# Altium PCB BodyTubeRev.PcbDoc
Units mil, origin at the board's own origin, x right, y up, seen from the top; angles counter-clockwise.
Board outline 3300 x 3900 mil, 2 copper layers (Top Layer, Bottom Layer); 21 components, 32 nets, 220 pads, 12 vias.
Unrouted connection lines stored in the file: 6.
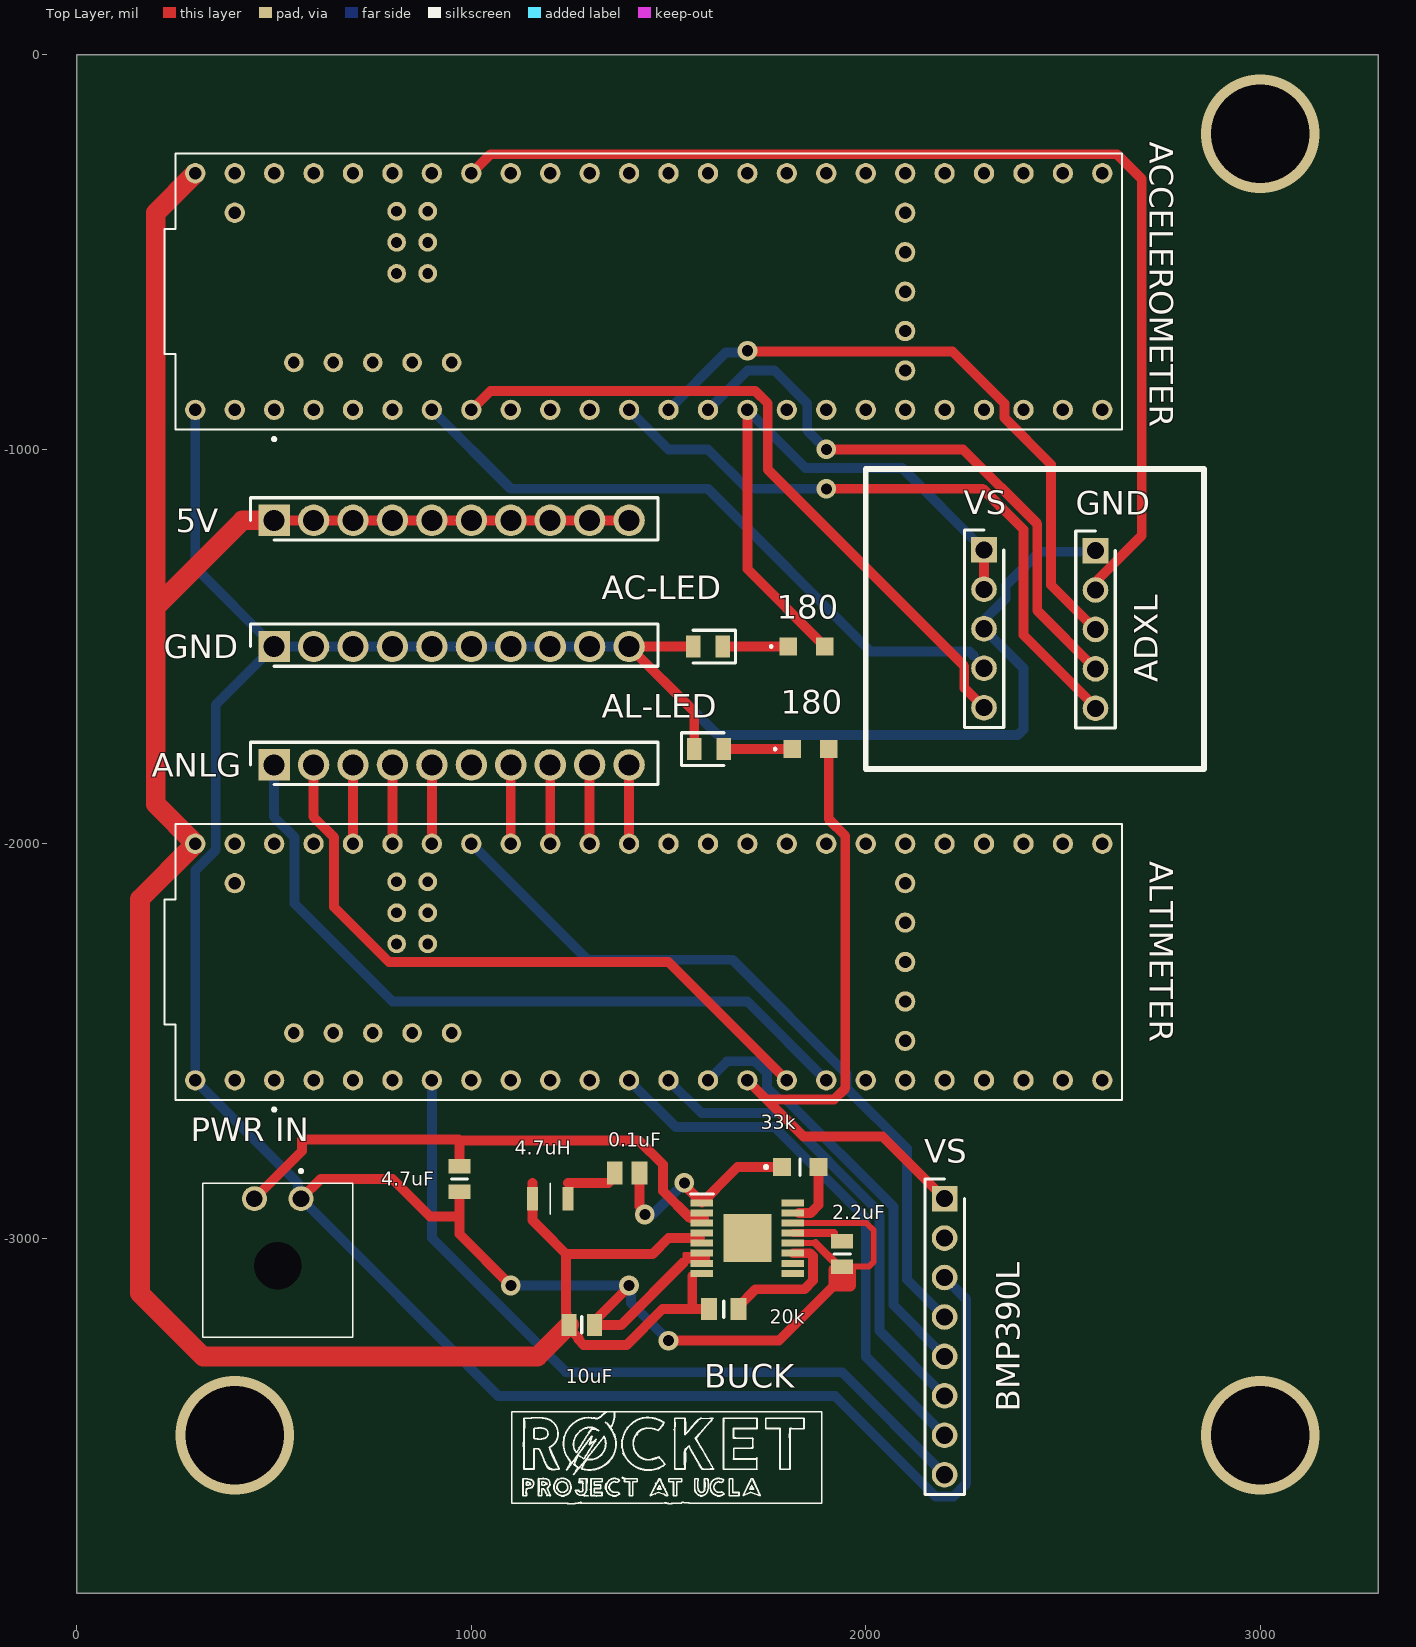
[diagram p0: Top Layer view]
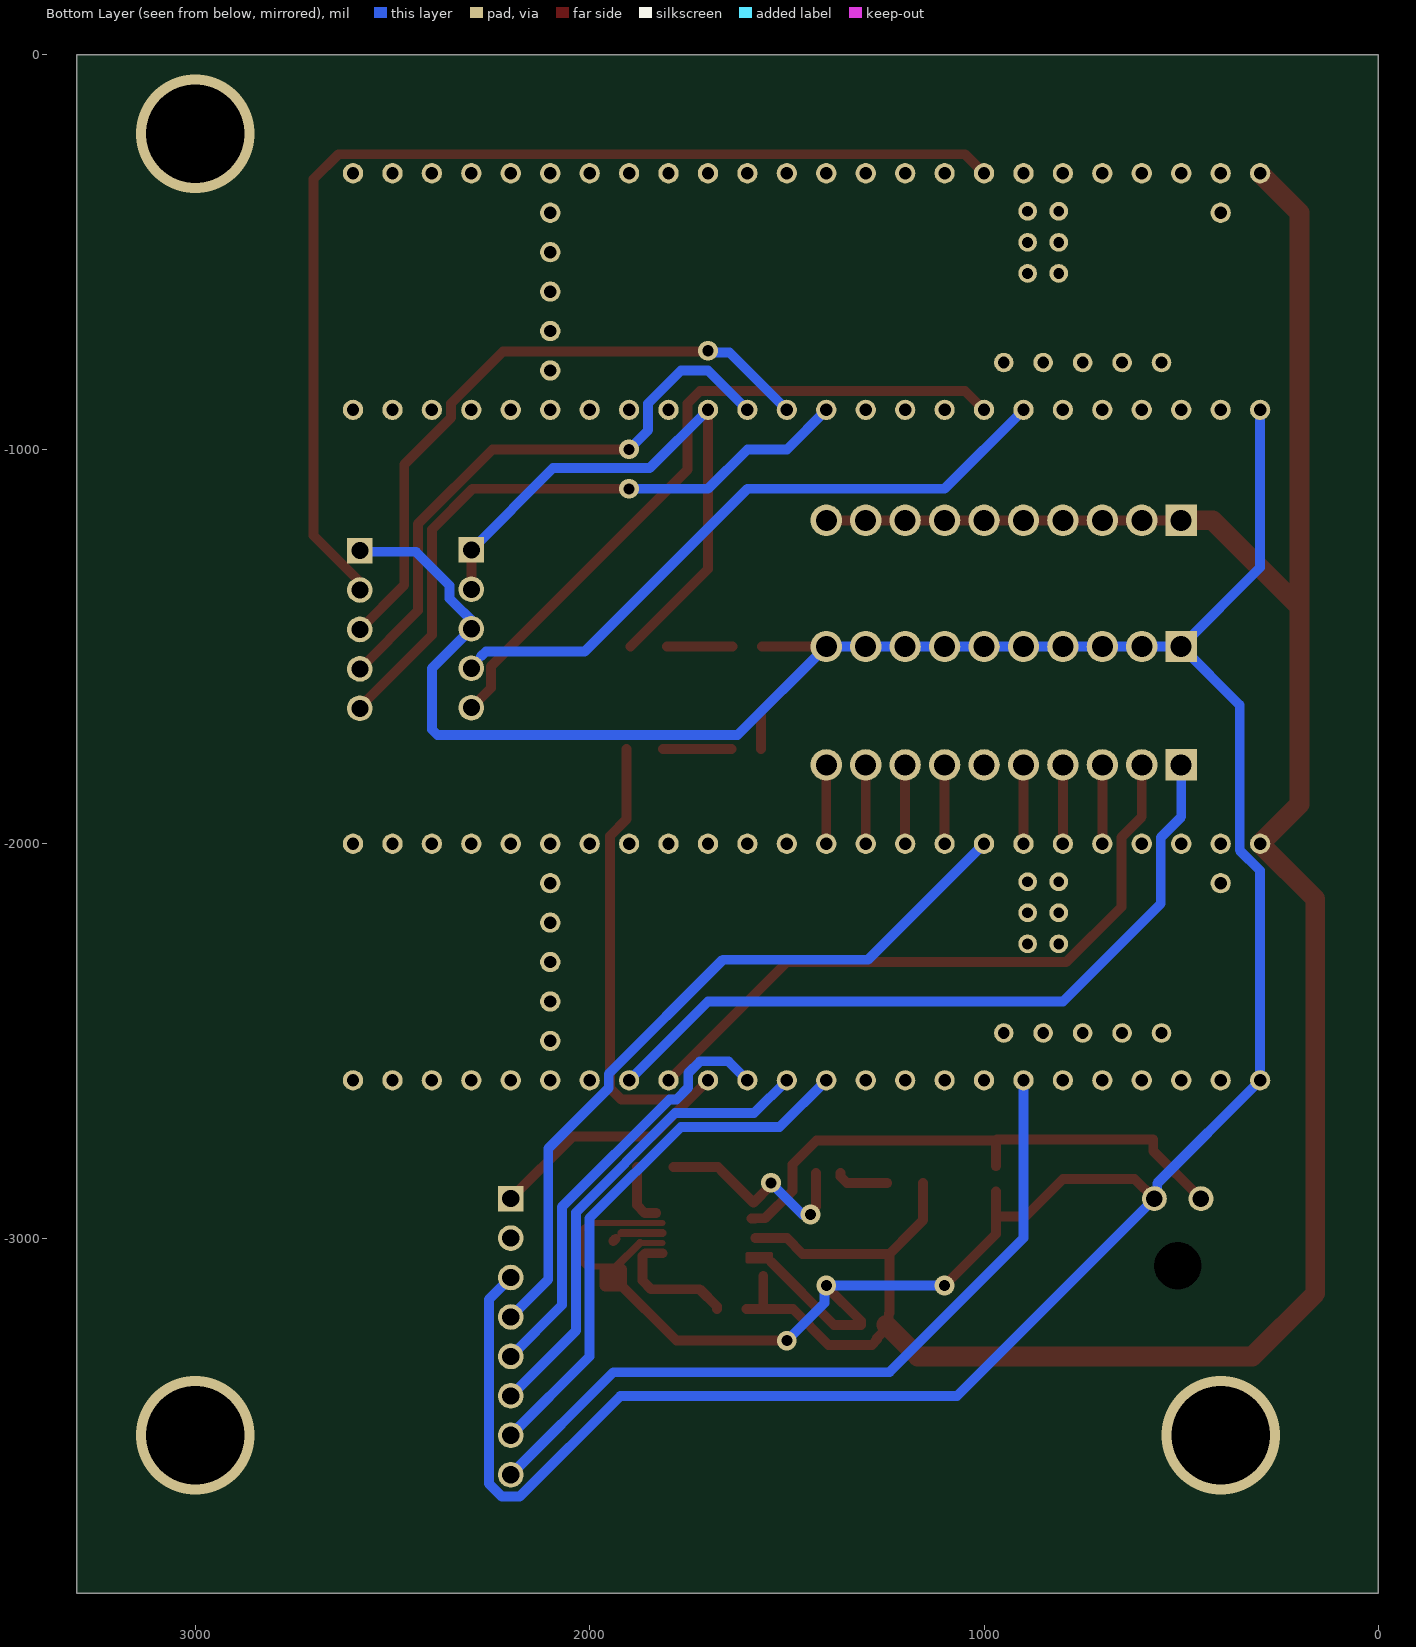
[diagram p1: Bottom Layer view, seen from below]
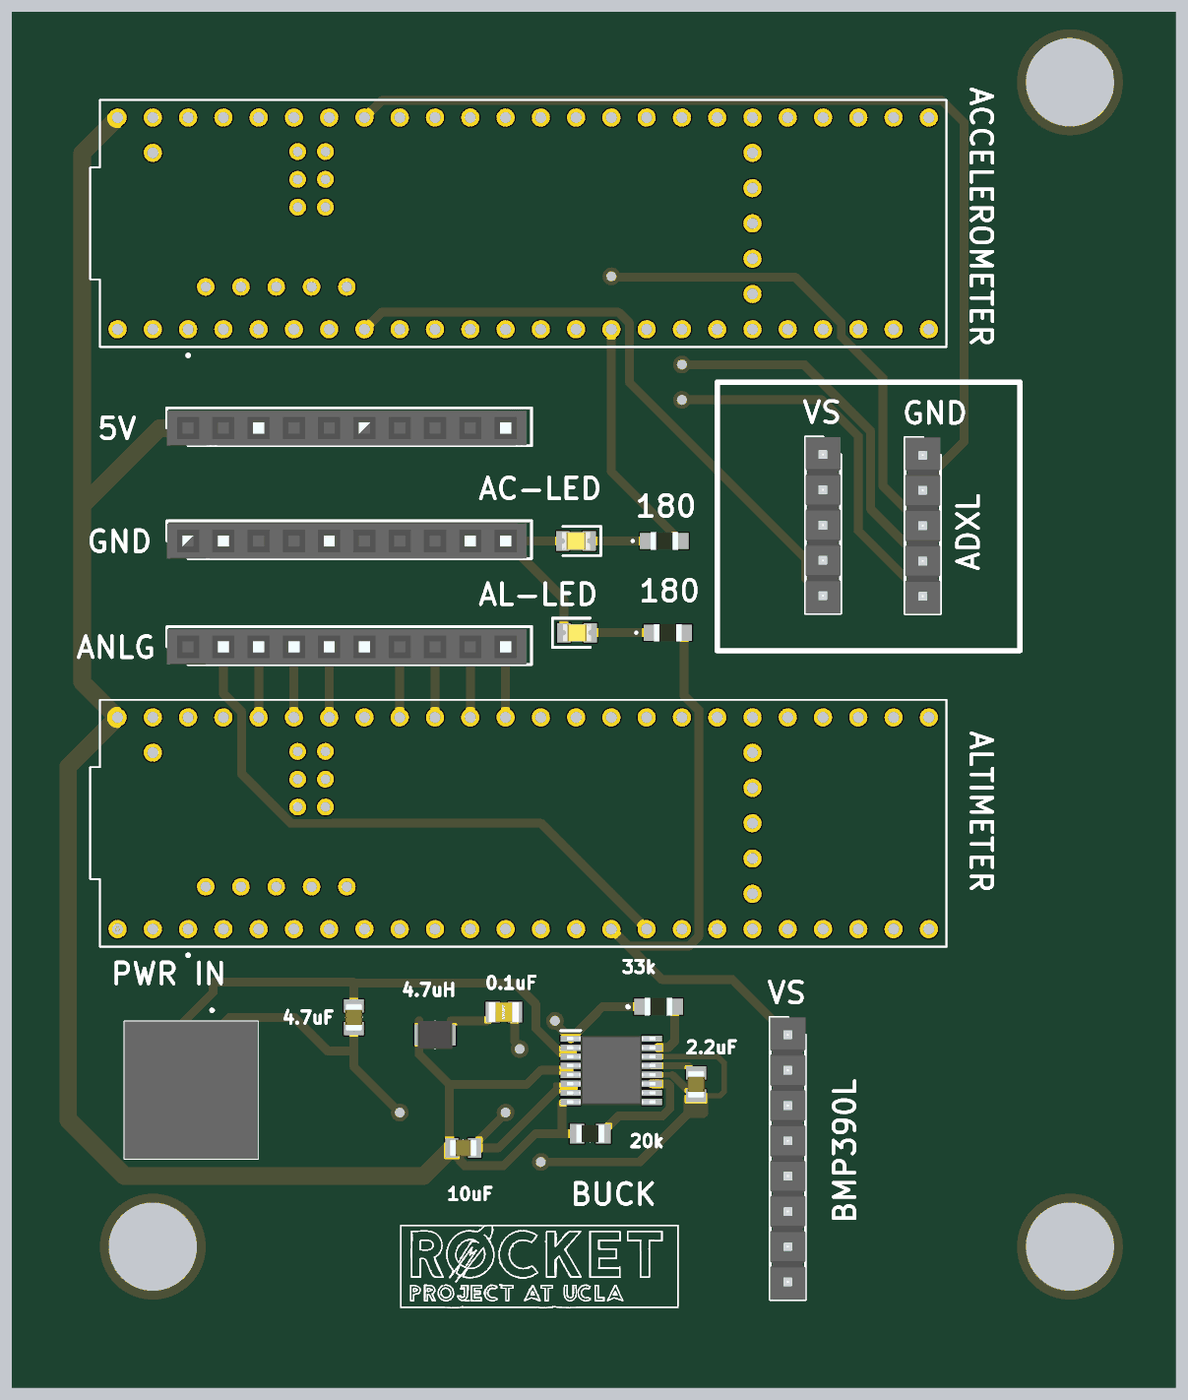
[diagram p2: 3D render of the assembled board from above, using the file's embedded part models]

## Layer stack, top to bottom
Top Solder: solder mask 0.4, Solder Resist, Dk 3.5
Top Layer: signal copper 1.4
Dielectric 1: dielectric 12.6, FR-4, Dk 4.8
Bottom Layer: signal copper 1.4
Bottom Solder: solder mask 0.4, Solder Resist, Dk 3.5

## Board outline
0,-3900 3300,-3900 3300,0 0,0

## Design rules (kind name [scope] priority, off if disabled: settings)
Clearance [All] p1: gap=10 ignorepadtopadclearanceinfootprint=FALSE except(0: Arc-Hole Track-Hole SMDPad-Hole THPad-Hole Via-Hole Fill-Hole Poly-Hole Region-Hole Text-Hole)
PolygonConnect [All] p1: connectstyle=Relief reliefconductorwidth=10 reliefentries=4 polygonreliefangle="90 Angle" airgapwidth=10
RoutingVias [All] p1: holewidth=50 width=100 viastyle="Through Hole" minholewidth=28 minwidth=50 maxholewidth=50 maxwidth=100
SolderMaskExpansion [All] p1: expansion=4 istentingtop=FALSE
Width [All] p1: maxlimit=25 minlimit=10 preferedwidth=10
30 further rules are at their usual default settings.

## Classes and differential pairs
component class BodyTubeRev: 0.1uF 2.2uF 4.7uF 4.7uH 5V 10uF 20k 33k 180 AC-LED ACCELEROMETER AL-LED ALTIMETER ANLG BUCK GND "PWR IN" VS

## Components (designator, comment, footprint, x,y, rotation, side; value= is the part's Value field where it differs from the comment)
0.1uF "0.1 uF" CAPC2012X88N 1395,-2835 r0 top (schematic designator C1)
2.2uF "2.2 uF" CAPC2012X140N 1940,-3040 r90 top (schematic designator C3)
4.7uF "4.7 uF" CAPC2012X140N 970,-2850 r90 top (schematic designator C2)
4.7uH "4.7 uH" LQM2HPN1R0MG0L 1200,-2900 r180 top (schematic designator L1)
5V "5V" RHDR10W80P0X254_1X10_2590X254X850P 500,-1180 r0 top (schematic designator J5)
10uF "10 uF" CAPC2012X140N 1280,-3220 r0 top (schematic designator C4)
20k "20k" RESC2012X70N 1640,-3180 r0 top (schematic designator R4)
33k "33K" ERJ6ENF1000V 1833.74,-2820 r0 top (schematic designator R3)
180 "180" ERJ6EN_(0805) 1850,-1500 r0 top (schematic designator R2)
180 "180" ERJ6EN_(0805) 1860,-1760 r0 top (schematic designator R1)
AC-LED "" LEDC2012X80N 1600,-1500 r180 top (schematic designator LED2)
ACCELEROMETER "ACCELEROMETER" MODULE_DEV-16771 1450,-600 r0 top (schematic designator U2)
AL-LED "" LEDC2012X80N 1602.6,-1760 r0 top (schematic designator LED1)
ALTIMETER "ALTIMETER" MODULE_DEV-16771 1450,-2300 r0 top (schematic designator U1)
ANLG "ANALOG" RHDR10W80P0X254_1X10_2590X254X850P 500,-1800 r0 top (schematic designator J4)
BUCK "BUCK" SOP65P638X110-17N 1700,-3000 r0 top (schematic designator IC1)
GND "GND" RHDR10W80P0X254_1X10_2590X254X850P 500,-1500 r0 top (schematic designator J7)
GND "GND Pin 1 Side" HDRV5W64P0X254_1X5_1270X254X813P 2582.68,-1256.69 r90 top (schematic designator J3)
"PWR IN" "POWER IN" 0436500201 568.11,-2900 r0 top (schematic designator J6)
VS "VS Pin 1 Side" HDRV5W64P0X254_1X5_1270X254X813P 2300,-1255 r90 top (schematic designator J2)
VS "BMP390L VS Pin 1" HDRV8W64P0X254_1X8_2032X254X813P 2200,-2900 r90 top (schematic designator J1)

## Footprints (in the part's own frame and the unit in brackets; to place one, negate y for a bottom-side part, rotate by r counter-clockwise, add the part's x,y. Pads: shape width x height; smd on the part's side, far side on the other; paste and mask are expansions set on the pad)
0436500201 [mm]
  round 1.605 hole 1.07: 1(0,0) 2(-3,0)
  round 1.525 hole 3.05 unplated: MH1(-1.5,-4.32)
  silkscreen extent -6.32,-8.92 3.32,1.88, body extent -6.32,-8.92 3.32,0.98, height 5.92
CAPC2012X88N [mm]
  rect 1.02x1.47 smd: 1(-0.8,0) 2(0.8,0)
  body extent -1.1,-0.73 1.1,0.72, height 0.88
CAPC2012X140N [mm]
  rect 0.94x1.43 smd: 1(-0.82,0) 2(0.82,0)
  silkscreen extent 0,-0.53 0,0.53, body extent -1,-0.63 1,0.63, height 1.4
ERJ6EN_(0805) [mm]
  rect 1.15x1.15 smd: 1(-1.175,0) 2(1.175,0)
  silkscreen extent -2.32,-0.05 -2.22,0.05, body extent -1,-0.63 1,0.63, height 0.6
ERJ6ENF1000V [mm]
  rect 1.15x1.15 smd: 1(-1.175,0) 2(1.175,0)
  silkscreen extent -2.3,-0.53 0,0.53, body extent -1,-0.63 1,0.63, height 0.6
HDRV5W64P0X254_1X5_1270X254X813P [mm]
  rect 1.65x1.65 hole 1.1: 1(0,0)
  round 1.65 hole 1.1: 2(-2.54,0) 3(-5.08,0) 4(-7.62,0) 5(-10.16,0)
  silkscreen extent -11.43,-1.27 1.27,1.27, body extent -11.43,-1.27 1.27,1.27, height 8.13
HDRV8W64P0X254_1X8_2032X254X813P [mm]
  rect 1.65x1.65 hole 1.1: 1(0,0)
  round 1.65 hole 1.1: 2(-2.54,0) 3(-5.08,0) 4(-7.62,0) 5(-10.16,0) 6(-12.7,0) 7(-15.24,0) 8(-17.78,0)
  silkscreen extent -19.05,-1.27 1.27,1.27, body extent -19.05,-1.27 1.27,1.27, height 8.13
LEDC2012X80N [mm]
  rect 0.95x1.4 smd: 1(-0.95,0) 2(0.95,0)
  silkscreen extent -1.78,-1.05 0.95,1.05, body extent -1,-0.63 1,0.63, height 0.8
LQM2HPN1R0MG0L [mm]
  rect 0.7x1.5 smd: 1(-1.15,0) 2(1.15,0)
  silkscreen extent 0,-1 0,1, body extent -1.25,-1 1.25,1, height 0.91
MODULE_DEV-16771 [mm]
  round 1.308 hole 0.8: 0(-26.67,-7.62) 1(-24.13,-7.62) 2(-21.59,-7.62) 3(-19.05,-7.62) 3.3V_1(6.35,-7.62) 3.3V_2(-24.13,7.62) 3.3V_3(16.51,-2.54) 4(-16.51,-7.62) 5(-13.97,-7.62) 6(-11.43,-7.62) 7(-8.89,-7.62) 8(-6.35,-7.62) 9(-3.81,-7.62) 10(-1.27,-7.62) 11(1.27,-7.62) 12(3.81,-7.62) 13(3.81,7.62) 14(1.27,7.62) 15(-1.27,7.62) 16(-3.81,7.62) 17(-6.35,7.62) 18(-8.89,7.62) 19(-11.43,7.62) 20(-13.97,7.62) 21(-16.51,7.62) 22(-19.05,7.62) 23(-21.59,7.62) 24(8.89,-7.62) 25(11.43,-7.62) 26(13.97,-7.62) 27(16.51,-7.62) 28(19.05,-7.62) 29(21.59,-7.62) 30(24.13,-7.62) 31(26.67,-7.62) 32(29.21,-7.62) 33(29.21,7.62) 34(26.67,7.62) 35(24.13,7.62) 36(21.59,7.62) 37(19.05,7.62) 38(16.51,7.62) 39(13.97,7.62) 40(11.43,7.62) 41(8.89,7.62) GND1(-29.21,-7.62) GND2(6.35,7.62) GND3(-26.67,7.62) GND4(16.51,0) ON/OFF(16.51,5.08) PROGRAM(16.51,2.54) VBAT(16.51,-5.08) VIN(-29.21,7.62) VUSB(-26.67,5.08)
  round 1.258 hole 0.75: 5V(-22.86,-4.57) D+(-17.78,-4.57) D-(-20.32,-4.57) USB_GND1(-15.24,-4.57) USB_GND2(-12.7,-4.57)
  round 1.208 hole 0.7: GND5(-14.24,3.17) LED(-16.24,3.17) R+(-16.24,5.17) R-(-14.24,5.17) T+(-14.24,1.17) T-(-16.24,1.17)
  silkscreen extent -31.18,-9.6 30.48,8.89
RESC2012X70N [mm]
  rect 1.05x1.4 smd: 1(-0.95,0) 2(0.95,0)
  silkscreen extent 0,-0.53 0,0.53, body extent -1,-0.63 1,0.63, height 0.7
RHDR10W80P0X254_1X10_2590X254X850P [mm]
  rect 2.025x2.025 hole 1.35: 1(0,0)
  round 2.025 hole 1.35: 2(2.54,0) 3(5.08,0) 4(7.62,0) 5(10.16,0) 6(12.7,0) 7(15.24,0) 8(17.78,0) 9(20.32,0) 10(22.86,0)
  silkscreen extent -1.52,-1.27 24.73,1.46, body extent -1.52,-1.27 24.38,1.27, height 8.5
SOP65P638X110-17N [mm]
  rect 1.45x0.45 smd: 1(-2.925,2.275) 2(-2.925,1.625) 3(-2.925,0.975) 4(-2.925,0.325) 5(-2.925,-0.325) 6(-2.925,-0.975) 7(-2.925,-1.625) 8(-2.925,-2.275) 9(2.925,-2.275) 10(2.925,-1.625) 11(2.925,-0.975) 12(2.925,-0.325) 13(2.925,0.325) 14(2.925,0.975) 15(2.925,1.625) 16(2.925,2.275)
  rect 3.1x3.1 smd: 17(0,0)
  silkscreen extent -3.65,2.85 -2.2,2.85, body extent -3.19,-2.5 3.19,2.5, height 1.1

## Part data
0.1uF: library part C0805C222K5RAC7025, "Capacitor", Manufacturer_Name=KEMET, Mouser Part Number=80-C0805C222K5RACTM, Datasheet Link=https://componentsearchengine.com/Datasheets/1/C0805C222K5RAC7025.pdf, Height=0.88mm, Manufacturer_Part_Number=C0805C222K5RAC7025, Mouser Price/Stock=https://www.mouser.com/Search/Refine.aspx?Keyword=80-C0805C222K5RACTM
2.2uF 10uF: library part C0805C106K8PAC7800, "Capacitor", Manufacturer_Name=KEMET, Mouser Part Number=N/A, Arrow Part Number=C0805C106K8PAC7800, Arrow Price/Stock=https://www.arrow.com/en/products/c0805c106k8pac7800/kemet-corporation, Datasheet Link=https://www.kemet.com/specsheet/C0805C106K8PACTU, Height=1.4mm, Manufacturer_Part_Number=C0805C106K8PAC7800, Mouser Price/Stock=https://www.mouser.co.uk/ProductDetail/KEMET/C0805C106K8PAC7800?qs=IIhARexJuVizGHbK1ryyMw%3D%3D
4.7uF: library part GRM21BR61H475KE51L, "Capacitor", Manufacturer_Name="Murata Electronics", Mouser Part Number=81-GRM21BR61H475KE1L, Arrow Part Number=GRM21BR61H475KE51L, Arrow Price/Stock=https://www.arrow.com/en/products/grm21br61h475ke51l/murata-manufacturing, Datasheet Link=https://www.murata.com/en-global/products/productdetail?partno=GRM21BR61H475KE51%23, Height=1.4mm, Manufacturer_Part_Number=GRM21BR61H475KE51L, Mouser Price/Stock=https://www.mouser.co.uk/ProductDetail/Murata-Electronics/GRM21BR61H475KE51L?qs=eeBpzGFlv%252B%252BOtLzDC1PY6Q%3D%3D
4.7uH: library part LQH2HPN4R7MGRL, "Inductor", Manufacturer_Name="Murata Electronics", Mouser Part Number=81-LQH2HPN4R7MGRL, Datasheet Link=https://psearch.en.murata.com/inductor/product/LQH2HPN4R7MGR%23.html, Height=1mm, Manufacturer_Part_Number=LQH2HPN4R7MGRL, Mouser Price/Stock=https://www.mouser.co.uk/ProductDetail/Murata-Electronics/LQH2HPN4R7MGRL?qs=F2r4PX9PQ5%2FHtLwVyG%252BobA%3D%3D
5V ANLG GND: library part PPTC101LFBN-RC, "Connector", Manufacturer_Name=Sullins, Datasheet Link=http://www.sullinscorp.com/drawings/78_P(N)PxCxxxLFBN-RC,_10492-H.pdf, Height=8.5mm, Manufacturer_Part_Number=PPTC101LFBN-RC
20k: library part ERJ-6GEYJ203V, "Resistor", Manufacturer_Name=Panasonic, Mouser Part Number=667-ERJ-6GEYJ203V, Arrow Part Number=ERJ-6GEYJ203V, Arrow Price/Stock=https://www.arrow.com/en/products/erj-6geyj203v/panasonic?region=nac, Datasheet Link=https://datasheet.datasheetarchive.com/originals/distributors/DKDS40/DSANUWW0010960.pdf, Height=0.7mm, Manufacturer_Part_Number=ERJ-6GEYJ203V, Mouser Price/Stock=https://www.mouser.co.uk/ProductDetail/Panasonic/ERJ-6GEYJ203V?qs=tQNqqtTOejJRgZ3KHnkKUg%3D%3D
33k: library part ERJ-6ENF33R0V, "Resistor", Manufacturer_Name=Panasonic, Mouser Part Number=667-ERJ-6ENF33R0V, Arrow Part Number=ERJ-6ENF33R0V, Arrow Price/Stock=https://www.arrow.com/en/products/erj-6enf33r0v/panasonic, Datasheet Link=https://industrial.panasonic.com/cdbs/www-data/pdf/RDA0000/AOA0000C84.pdf, Height=0.7mm, Manufacturer_Part_Number=ERJ-6ENF33R0V, Mouser Price/Stock=https://www.mouser.com/Search/Refine.aspx?Keyword=667-ERJ-6ENF33R0V
180 180: library part ERJ-6ENF1800V, "Resistor", Manufacturer_Name=Panasonic, Mouser Part Number=667-ERJ-6ENF1800V, Datasheet Link=http://industrial.panasonic.com/cdbs/www-data/pdf/RDA0000/AOA0000C304.pdf, Height=0.55mm, Manufacturer_Part_Number=ERJ-6ENF1800V, Mouser Price/Stock=https://www.mouser.com/Search/Refine.aspx?Keyword=667-ERJ-6ENF1800V
AC-LED AL-LED: library part HSMG-C170, "LED", Manufacturer_Name="Avago Technologies", Mouser Part Number=630-HSMG-C170, Datasheet Link=https://datasheet.datasheetarchive.com/originals/distributors/SFDatasheet-4/sf-00083853.pdf, Height=0.8mm, Manufacturer_Part_Number=HSMG-C170, Mouser Price/Stock=https://www.mouser.co.uk/ProductDetail/Broadcom-Avago/HSMG-C170?qs=YDL0qNrpDT4lm8ArMPkMEA%3D%3D
ACCELEROMETER ALTIMETER: library part DEV-16771, "RT1062 Teensy 4.1 i.MX ARM Cortex-M7 MPU Embedded Evaluation Board", Package=None, Availability=Unavailable, MP=DEV-16771, Price=None
BUCK: library part MAX16903RAUE50_V+, "Integrated Circuit", Manufacturer_Name="Maxim Integrated", Manufacturer_Part_Number=MAX16903RAUE50/V+, Mouser Part Number=700-16903RAUE50/V+, Datasheet Link=https://datasheets.maximintegrated.com/en/ds/MAX16903.pdf, Height=1.1mm, Mouser Price/Stock=https://www.mouser.co.uk/ProductDetail/Maxim-Integrated/MAX16903RAUE50-V%2b?qs=Mc2rGIXtnyUsUinGDh5nEw%3D%3D
GND VS: library part DW-05-07-T-S-200, "Connector", Manufacturer_Name=SAMTEC, Mouser Part Number=200-DW0507TS200, Arrow Part Number=DW-05-07-T-S-200, Arrow Price/Stock=https://www.arrow.com/en/products/dw-05-07-t-s-200/samtec, Datasheet Link=https://www.mouser.com/datasheet/2/527/dw-1369989.pdf, Height=8.13mm, Manufacturer_Part_Number=DW-05-07-T-S-200, Mouser Price/Stock=https://www.mouser.co.uk/ProductDetail/Samtec/DW-05-07-T-S-200?qs=0lQeLiL1qyZSRFH01KKlBQ%3D%3D
"PWR IN": library part 0436500201, "Connector", Manufacturer_Name=Molex, Mouser Part Number=N/A, Arrow Part Number=0436500201, Arrow Price/Stock=https://www.arrow.com/en/products/0436500201/molex?region=europe, Datasheet Link=https://www.molex.com/pdm_docs/ps/PS-43650.pdf, Height=5.82mm, Manufacturer_Part_Number=0436500201, Mouser Price/Stock=https://www.mouser.co.uk/ProductDetail/Molex/0436500201?qs=PBcRNPEHKsr2cwDQOTxBPQ%3D%3D
VS: library part DW-08-07-T-S-200, "Connector", Manufacturer_Name=SAMTEC, Mouser Part Number=200-DW0807TS200, Arrow Part Number=DW-08-07-T-S-200, Arrow Price/Stock=https://www.arrow.com/en/products/dw-08-07-t-s-200/samtec, Datasheet Link=https://suddendocs.samtec.com/catalog_english/dw.pdf, Height=8.13mm, Manufacturer_Part_Number=DW-08-07-T-S-200, Mouser Price/Stock=https://www.mouser.co.uk/ProductDetail/Samtec/DW-08-07-T-S-200?qs=wPucwuAL3e1XRCWx48%252BLdg%3D%3D

## Via types
v1: diameter 50, hole 28, Top Layer to Bottom Layer, tented both sides, 8 vias
v2: diameter 300, hole 250, Top Layer to Bottom Layer, tented both sides, 3 vias
v3: diameter 23.62, hole 11.81, Top Layer to Bottom Layer, tented both sides, 1 vias

## Nets (pads, with @x,y where several pads share a name; then routed paths per layer and width w, separated by ;. In a path a pad name is that pad's centre, name@x,y a point inside that pad or via, vN(x,y) a via of type N, cw(c..) or ccw(c..) an arc to the next point about the centre after c; other vN are vias at no path point)
GND: 2.2uF.1 4.7uF.1 10uF.2 "PWR IN.1" AC-LED.1 ACCELEROMETER.GND1 AL-LED.1 ALTIMETER.GND1 BUCK.6 BUCK.7 BUCK.12 BUCK.14 GND.1 GND.2@600,-1500 GND.3@700,-1500 GND.4@800,-1500 GND.5@900,-1500 GND.6 GND.7 GND.8 GND.9 GND.10 VS.3 | length 10036.6
  Top Layer w25: 568.11,-2900 618.11,-2850 800,-2850 895,-2945 970,-2945 ; 4.7uF.1 970,-2945 ; v1(1100,-3120) 970,-2990 970,-2945 ; v1(1400,-3120) 1400,-3122.64 1312.28,-3210.35 10uF.2 1380,-3220 1540,-3060 ; GND.10 1565.2,-1665.2 AL-LED.1 ; v1(1500,-3260) 1780,-3260 1935.22,-3104.78 1940,-3104.78
  Bottom Layer w25: ACCELEROMETER.GND1 300,-1300 GND.1@500,-1500 ; v1(1100,-3120) v1(1400,-3120) 1404.78,-3124.78 1404.78,-3164.78 v1(1500,-3260) ; VS.3@2200,-3100 2254.98,-3154.98 2254.98,-3622.77 2222.77,-3654.98 2177.23,-3654.98 1922.25,-3400 1068.11,-3400 568.11,-2900 560.8,-2892.69 560.8,-2860.8 v3(300,-2600) 300,-2068.23 351.75,-2016.48 351.75,-1648.25 GND.1@500,-1500 ; GND.1@2585.46,-1259.84 2440.16,-1259.84 2354.98,-1345.02 2354.98,-1377.77 2288.88,-1443.88 2400,-1555 2400,-1710.11 2385.36,-1724.75 1624.75,-1724.75 GND.10 GND.9 GND.8 GND.7 GND.6 900,-1500 800,-1500 700,-1500 600,-1500 GND.1@500,-1500
NetC1_1: 0.1uF.1 4.7uH.1 | length 133.8
  Top Layer w25: 1245.28,-2860 1347.36,-2860 1363.5,-2843.86 0.1uF.1
NetC1_2: 0.1uF.2 33k.1 BUCK.1 | length 553.2
  Top Layer w25: 0.1uF.2 1426.5,-2919.73 1440,-2933.24 v1(1440,-2940) ; v1(1540,-2860) 1540,-2865.59 BUCK.1 1660,-2835.28 1660,-2834.64 1674.64,-2820 33k.1
  Bottom Layer w25: v1(1440,-2940) 1460,-2940 v1(1540,-2860)
NetC2_2: 4.7uF.2 "PWR IN.2" BUCK.2 BUCK.3 | length 1406.8
  Top Layer w25: 450,-2900 570.87,-2779.13 570.87,-2750 967.72,-2750 970,-2752.28 ; 4.7uF.2 970,-2752.28 ; 1590,-2950 1580,-2950 1579.81,-2949.81 1555,-2949.81 1485.8,-2880.61 1485.8,-2813.47 1424.62,-2752.28 970,-2752.28
NetC3_2: 2.2uF.2 BUCK.13 | length 8.5
  Top Layer w25: 2.2uF.2@1934,-3001.71 2.2uF.2
NetC4_1: 4.7uH.2 5V.1 5V.2 5V.3 5V.4 5V.5 5V.6 5V.7 5V.8 5V.9 5V.10 10uF.1 20k.1 ACCELEROMETER.VIN ALTIMETER.VIN BUCK.4 BUCK.5 BUCK.8 | length 6720.4
  Top Layer w25: 5V.1 5V.2 5V.3 5V.4 5V.5 5V.6 5V.7 5V.8 5V.9 5V.10 ; 1154.72,-2860 1154.72,-2954.72 1180,-2980 1240,-3040 ; BUCK.8@1560,-3095.33 1560,-3180 ; 1580,-3000 1500,-3000 1460,-3040 1240,-3040 ; 20k.1 1560,-3180 ; 1240,-3040 1240,-3189.71 1241.71,-3191.42 1241.71,-3204.35 1247.72,-3210.35 10uF.1 1247.72,-3229.65 1271.28,-3253.21 1271.28,-3257.47 1284.46,-3270.65 1394.12,-3270.65 1484.77,-3180 1560,-3180
  Top Layer w50: ACCELEROMETER.VIN 200,-400 200,-1400 ; 5V.1 420,-1180 200,-1400 ; 10uF.1 1167.72,-3300 320,-3300 160,-3140 160,-2140 ALTIMETER.VIN 200,-1900 200,-1400
NetIC1_11: 20k.2 BUCK.11 | length 338.8
  Top Layer w25: 20k.2 1677.4,-3173.11 1720.93,-3129.59 1844.36,-3129.59 1866.2,-3107.74 1866.2,-3045.8 1858.79,-3038.39 BUCK.11
NetIC1_15: 33k.2 BUCK.15 | length 153.4
  Top Layer w25: BUCK.15@1831.2,-2936.02 1860.47,-2936.02 1880,-2916.5 33k.2
NetJ1_1: 180.2@1906.26,-1760 ALTIMETER.3.3V_1 VS.1@2200,-2900 | length 1713.3
  Top Layer w25: ALTIMETER.3.3V_1 1748.25,-2648.25 ; 180.2@1906.26,-1760 1906.26,-1938.03 1948.25,-1980.01 1948.25,-2619.99 1919.99,-2648.25 1748.25,-2648.25 ; VS.1@2200,-2900 2042.54,-2742.54 1842.54,-2742.54 1748.25,-2648.25
NetJ1_4: ALTIMETER.19 VS.4@2200,-3200 | length 1912.8
  Bottom Layer w25: ALTIMETER.19 1294.29,-2294.29 1662.53,-2294.29 1951.75,-2583.52 1951.75,-2619.99 2105,-2773.23 2105,-3105 VS.4@2200,-3200
NetJ1_5: ALTIMETER.12 VS.5@2200,-3300 | length 1097.4
  Bottom Layer w25: ALTIMETER.12 1648.25,-2551.75 1719.99,-2551.75 1750,-2581.77 1750,-2618.23 1780.01,-2648.25 1797.75,-2648.25 2070,-2920.5 2070,-3170 VS.5@2200,-3300
NetJ1_6: ALTIMETER.11 VS.6 | length 1207.1
  Bottom Layer w25: ALTIMETER.11 1583.25,-2683.25 1783.25,-2683.25 2035,-2935 2035,-3235 VS.6
NetJ1_7: ALTIMETER.10 VS.7 | length 1378.1
  Bottom Layer w25: ALTIMETER.10 1518.25,-2718.25 1768.75,-2718.25 2000,-2949.5 2000,-3300 VS.7
NetJ1_8: ALTIMETER.5 VS.8 | length 1948.5
  Bottom Layer w25: ALTIMETER.5 900,-3000 1240,-3340 1940,-3340 VS.8
NetJ2_1: 180.2@1896.26,-1500 ACCELEROMETER.3.3V_1 VS.1@2300,-1255 VS.2@2300,-1355 | length 1528.9
  Top Layer w25: ACCELEROMETER.3.3V_1 1700,-1303.74 180.2@1896.26,-1500 ; VS.2@2300,-1355 VS.1@2300,-1255
  Bottom Layer w25: ACCELEROMETER.3.3V_1 1847.5,-1047.5 2092.5,-1047.5 2300,-1255 VS.1@2300.41,-1255.41
NetJ2_4: ACCELEROMETER.5 VS.4@2300,-1555 | length 1634
  Bottom Layer w25: ACCELEROMETER.5 1100,-1100 1600,-1100 2012.37,-1512.37 2262.88,-1512.37 2275.25,-1524.75
NetJ2_5: ACCELEROMETER.6 VS.5@2300,-1655 | length 1783.5
  Top Layer w25: ACCELEROMETER.6 1048.25,-851.75 1719.99,-851.75 1751.75,-883.52 1751.75,-1051.75 2250,-1550 2250,-1605 VS.5@2300,-1655
NetJ3_2: ACCELEROMETER.19 GND.2@2582.68,-1356.69 | length 2830.5
  Top Layer w25: ACCELEROMETER.19 1048.25,-251.75 2637.11,-251.75 2700,-314.64 2700,-1218.11 GND.2@2572.05,-1346.06
NetJ3_3: ACCELEROMETER.11 GND.3@2582.68,-1456.69 | length 1638
  Top Layer w25: v1(1700,-750) 1701.75,-751.75 2219.99,-751.75 2351.75,-883.52 2351.75,-919.99 2470,-1038.23 2470,-1344.02 GND.3@2582.68,-1456.69
  Bottom Layer w25: ACCELEROMETER.11 1645.22,-754.78 1695.22,-754.78 v1(1700,-750)
NetJ3_4: ACCELEROMETER.12 GND.4@2582.68,-1556.69 | length 1506.5
  Top Layer w25: v1(1900,-1000) 2246.28,-1000 2435,-1188.72 2435,-1409.02 GND.4@2582.68,-1556.69
  Bottom Layer w25: ACCELEROMETER.12 1700,-800 1768.23,-800 1851.75,-883.52 1851.75,-951.75 v1(1900,-1000)
NetJ3_5: ACCELEROMETER.10 GND.5@2582.68,-1656.69 | length 1651.6
  Top Layer w25: v1(1900,-1100) 2296.78,-1100 2400,-1203.22 2400,-1470.87 GND.5@2582.68,-1653.54
  Bottom Layer w25: ACCELEROMETER.10 1500,-1000 1600,-1000 1700,-1100 v1(1900,-1100)
NetJ4_1: ALTIMETER.25 ANLG.1 | length 1907.1
  Bottom Layer w25: ANLG.1 500,-1931.77 551.75,-1983.52 551.75,-2151.75 800,-2400 1700,-2400 ALTIMETER.25
NetJ4_2: ALTIMETER.24 ANLG.2 | length 1712.4
  Top Layer w25: ANLG.2 600,-1931.77 651.75,-1983.52 651.75,-2160.51 791.46,-2300.22 908.54,-2300.22 908.76,-2300 1500,-2300 ALTIMETER.24
NetJ4_3: ALTIMETER.22 ANLG.3 | length 200
  Top Layer w25: ALTIMETER.22 ANLG.3
NetJ4_4: ALTIMETER.21 ANLG.4 | length 200
  Top Layer w25: ALTIMETER.21 ANLG.4
NetJ4_5: ALTIMETER.20 ANLG.5 | length 220
  Top Layer w25: ALTIMETER.20 ANLG.5 ANLG.5@900,-1780
NetJ4_7: ALTIMETER.18 ANLG.7 | length 200
  Top Layer w25: ALTIMETER.18 ANLG.7
NetJ4_8: ALTIMETER.17 ANLG.8 | length 200
  Top Layer w25: ALTIMETER.17 ANLG.8
NetJ4_9: ALTIMETER.16 ANLG.9 | length 200
  Top Layer w25: ALTIMETER.16 ANLG.9
NetJ4_10: ALTIMETER.15 ANLG.10 | length 200
  Top Layer w25: ALTIMETER.15 ANLG.10
NetLED1_2: 180.1@1813.74,-1760 AL-LED.2 | length 173.7
  Top Layer w25: AL-LED.2 180.1@1813.74,-1760
NetLED2_2: 180.1@1803.74,-1500 AC-LED.2 | length 125.1
  Top Layer w25: 1678.6,-1500 180.1@1803.74,-1500
pads on no net: "PWR IN.MH1" ACCELEROMETER.0 ACCELEROMETER.1 ACCELEROMETER.2 ACCELEROMETER.3 ACCELEROMETER.3.3V_2 ACCELEROMETER.3.3V_3 ACCELEROMETER.4 ACCELEROMETER.5V ACCELEROMETER.7 ACCELEROMETER.8 ACCELEROMETER.9 ACCELEROMETER.13 ACCELEROMETER.14 ACCELEROMETER.15 ACCELEROMETER.16 ACCELEROMETER.17 ACCELEROMETER.18 ACCELEROMETER.20 ACCELEROMETER.21 ACCELEROMETER.22 ACCELEROMETER.23 ACCELEROMETER.24 ACCELEROMETER.25 ACCELEROMETER.26 ACCELEROMETER.27 ACCELEROMETER.28 ACCELEROMETER.29 ACCELEROMETER.30 ACCELEROMETER.31 ACCELEROMETER.32 ACCELEROMETER.33 ACCELEROMETER.34 ACCELEROMETER.35 ACCELEROMETER.36 ACCELEROMETER.37 ACCELEROMETER.38 ACCELEROMETER.39 ACCELEROMETER.40 ACCELEROMETER.41 ACCELEROMETER.D+ ACCELEROMETER.D- ACCELEROMETER.GND2 ACCELEROMETER.GND3 ACCELEROMETER.GND4 ACCELEROMETER.GND5 ACCELEROMETER.LED ACCELEROMETER.ON/OFF ACCELEROMETER.PROGRAM ACCELEROMETER.R+ ACCELEROMETER.R- ACCELEROMETER.T+ ACCELEROMETER.T- ACCELEROMETER.USB_GND1 ACCELEROMETER.USB_GND2 ACCELEROMETER.VBAT ACCELEROMETER.VUSB ALTIMETER.0 ALTIMETER.1 ALTIMETER.2 ALTIMETER.3 ALTIMETER.3.3V_2 ALTIMETER.3.3V_3 ALTIMETER.4 ALTIMETER.5V ALTIMETER.6 ALTIMETER.7 ALTIMETER.8 ALTIMETER.9 ALTIMETER.13 ALTIMETER.14 ALTIMETER.23 ALTIMETER.26 ALTIMETER.27 ALTIMETER.28 ALTIMETER.29 ALTIMETER.30 ALTIMETER.31 ALTIMETER.32 ALTIMETER.33 ALTIMETER.34 ALTIMETER.35 ALTIMETER.36 ALTIMETER.37 ALTIMETER.38 ALTIMETER.39 ALTIMETER.40 ALTIMETER.41 ALTIMETER.D+ ALTIMETER.D- ALTIMETER.GND2 ALTIMETER.GND3 ALTIMETER.GND4 ALTIMETER.GND5 ALTIMETER.LED ALTIMETER.ON/OFF ALTIMETER.PROGRAM ALTIMETER.R+ ALTIMETER.R- ALTIMETER.T+ ALTIMETER.T- ALTIMETER.USB_GND1 ALTIMETER.USB_GND2 ALTIMETER.VBAT ALTIMETER.VUSB ANLG.6 BUCK.9 BUCK.10 BUCK.16 BUCK.17 VS.2@2200,-3000
copper on no net: | length 1147.4
  Top Layer w10: 1540,-3060 1600,-3060 1600,-3040 1540,-3040 1540,-3060
  Top Layer w15: 1815.16,-3012.8 1872.8,-3012.8 ; 1815.16,-2961.61 2001.61,-2961.61 2020,-2980 2020,-3060 2007.72,-3072.28 1940,-3072.28
  Top Layer w20: 1815.16,-2987.2 1858.79,-2987.2 1919.49,-2987.2 ; 1872.8,-3012.8 1932.28,-3072.28
  Top Layer w25: 1400,-1500 1562.6,-1500 ; 1637.4,-1500 1678.6,-1500
  Top Layer w30: 1920,-3120 1960,-3120 1960,-3080 1920,-3080 1920,-3120
  other v2: 400,-3500 3000,-3500 3000,-200

## Other copper
Top Layer:
  region net GND: 1540,-3040 1600,-3040 1600,-3060 1540,-3060

## Silkscreen, mask and mechanical layers (free items; w line width, h text height)
Top Overlay:
  drawing of 6876 lines, arcs and shapes, not listed
  text "ADXL" at 2740,-1590 h60 r90
  text "BMP390L" at 2390,-3440 h60 r90
CUTOUT:
  the board outline again, w39.37

## Text inside footprints (layer, text, board x,y; h text height)
ACCELEROMETER: Mechanical 13 "Teensy 4.1" at 1440.16,-586.61 h50
ALTIMETER: Mechanical 13 "Teensy 4.1" at 1440.16,-2286.61 h50